# Altium PCB EXP-10-2.PcbDoc
Units mm, origin at the board's own origin, x right, y up, seen from the top; angles counter-clockwise.
Board outline 152.4 x 136.53 mm, 2 copper layers (Top Layer, Bottom Layer); 66 components, 92 nets, 204 pads, 26 vias.
Unrouted connection lines stored in the file: 16.
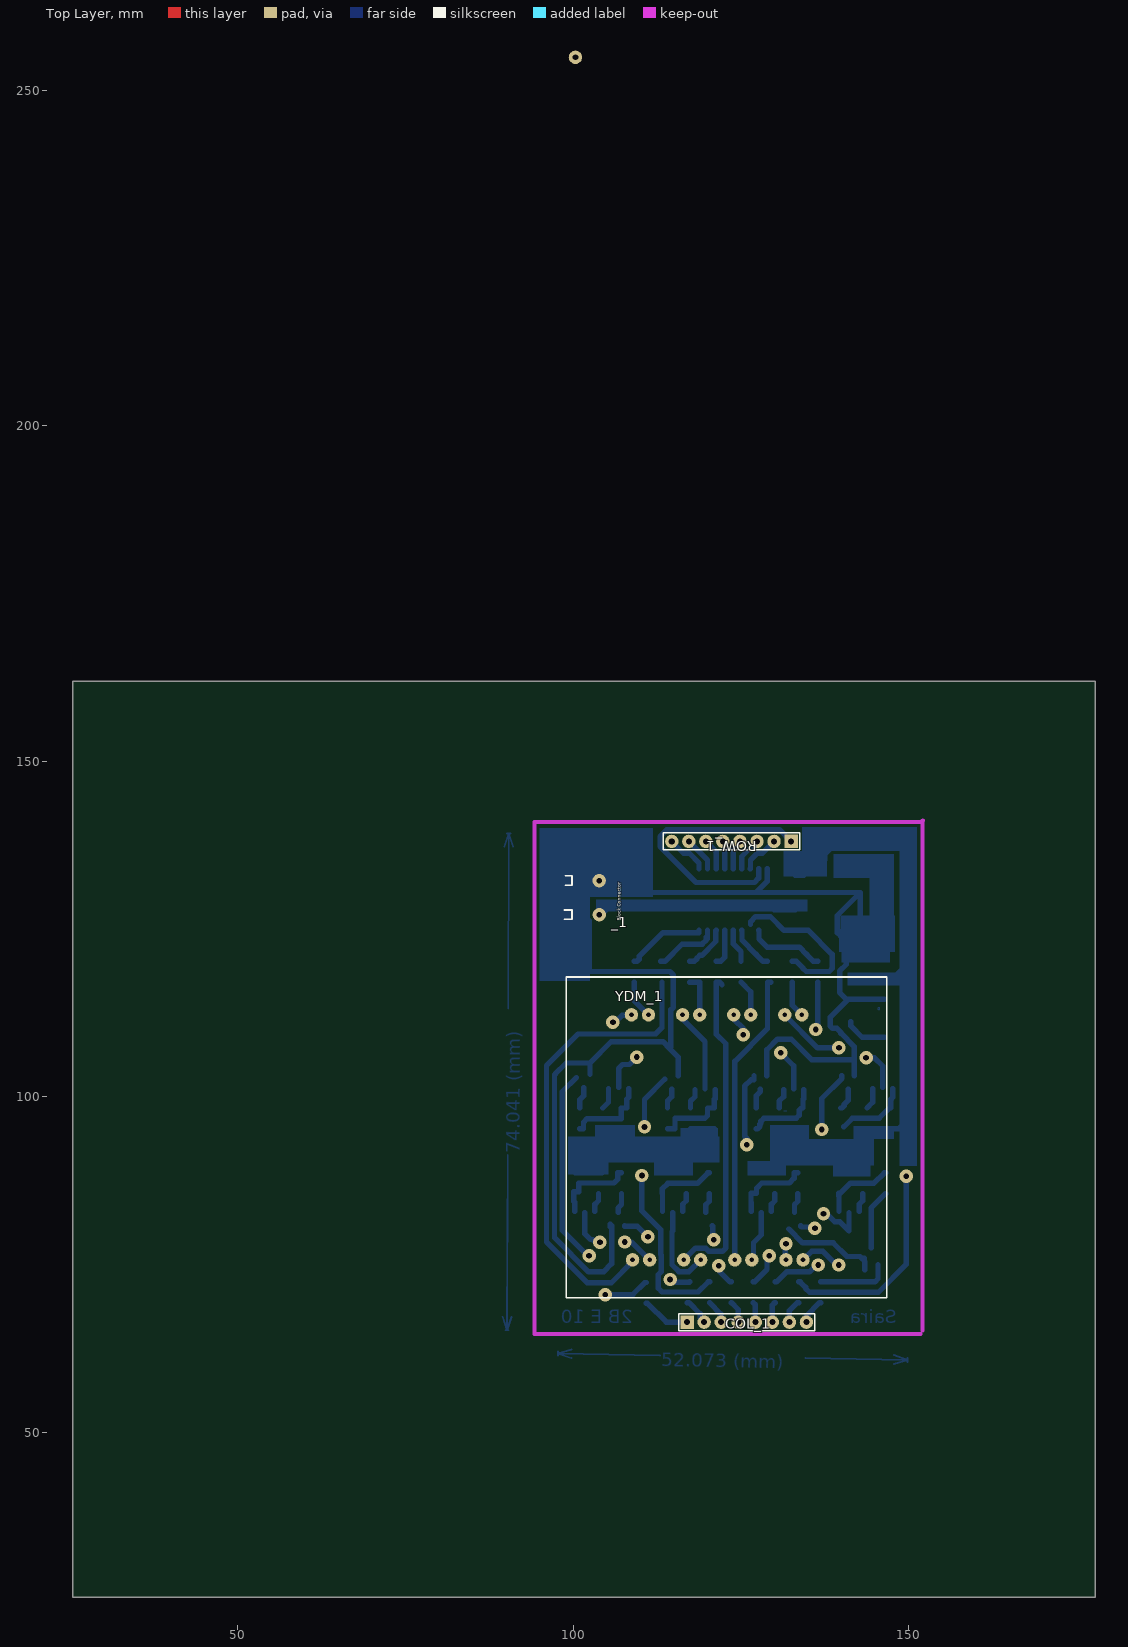
[diagram p0: Top Layer view]
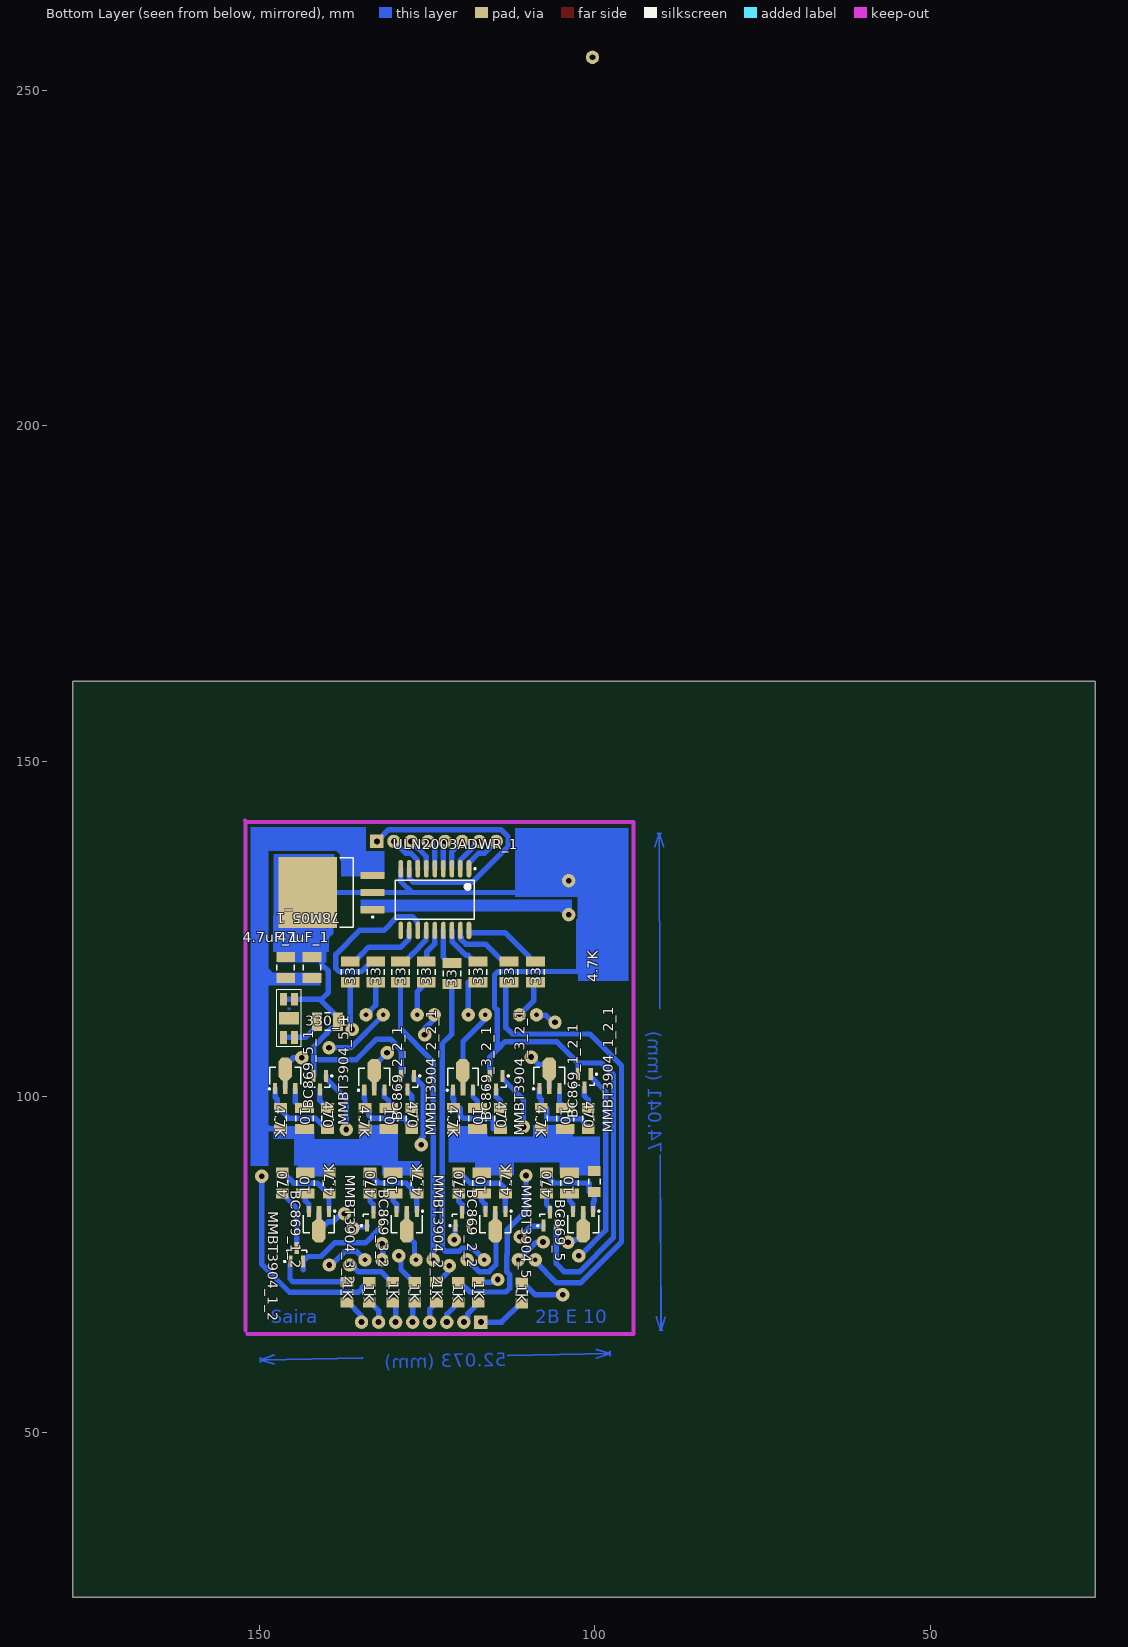
[diagram p1: Bottom Layer view, seen from below]

## Layer stack, top to bottom
Top Solder: solder mask 0.0102, Solder Resist, Dk 3.5
Top Layer: signal copper 0.0356
Dielectric 1: dielectric 0.32, FR-4, Dk 4.8
Bottom Layer: signal copper 0.0356
Bottom Solder: solder mask 0.0102, Solder Resist, Dk 3.5

## Board outline
25.4,25.4 177.8,25.4 177.8,161.925 25.4,161.925

## Design rules (kind name [scope] priority, off if disabled: settings)
Clearance [All] p1: gap=0.35 ignorepadtopadclearanceinfootprint=FALSE
ComponentClearance [All] p1 off: gap=0.254 collisioncheckmode=3 verticalgap=0.254 showdistances=FALSE
PlaneClearance [All] p1: clearance=0.85
PolygonConnect [All] p1: connectstyle=Direct reliefconductorwidth=0.254 reliefentries=4 polygonreliefangle="90 Angle" airgapwidth=0.254
RoutingVias [All] p1: holewidth=0.711 width=1.27 viastyle="Through Hole" minholewidth=0.711 minwidth=1.27 maxholewidth=0.711 maxwidth=1.27
SolderMaskExpansion [All] p1: expansion=0.102 istentingtop=FALSE
Width [All] p1: maxlimit=0.8 minlimit=0.8 preferedwidth=0.8
28 further rules are at their usual default settings.

## Components (designator, comment, footprint, x,y, rotation, side; value= is the part's Value field where it differs from the comment)
1K "Comment" RESC3216M 133.604,70.866 r270 bottom
1K "Comment" RESC3216M 110.871,70.765 r270 bottom
1K "Comment" RESC3216M 126.825,70.866 r270 bottom
1K "Comment" RESC3216M 120.317,70.866 r270 bottom
1K "Comment" RESC3216M 130.08,70.866 r270 bottom
1K "Comment" RESC3216M 123.571,70.866 r270 bottom
1K "Comment" RESC3216M 136.906,70.866 r270 bottom
1K "Comment" RESC3216M 117.348,70.866 r270 bottom
4.7K "Comment" RESC3216M 121.031,96.774 r270 bottom
4.7K "Comment" RESC3216M 134.239,96.774 r270 bottom
4.7K "Comment" RESC3216M 107.95,96.774 r270 bottom
4.7K "Comment" RESC3216M 146.812,96.774 r270 bottom
4.7K "Comment" RESC3216M 126.492,87.148 r90 bottom
4.7K "Comment" RESC3216M 113.284,87.148 r90 bottom
4.7K "Comment" RESC3216M 139.573,87.148 r90 bottom
4.7K "Comment" RESC3216M 100.055,87.376 r90 bottom
4.7uF_1 "Comment" CAPC3225M 146.05,119.253 r90 bottom
10 "Comment" RESC3225M 117.475,96.774 r270 bottom
10 "Comment" RESC3225M 130.683,96.774 r270 bottom
10 "Comment" RESC3225M 104.394,96.774 r270 bottom
10 "Comment" RESC3225M 143.256,96.774 r270 bottom
10 "Comment" RESC3225M 130.048,87.122 r90 bottom
10 "Comment" RESC3225M 116.84,87.122 r90 bottom
10 "Comment" RESC3225M 143.129,87.122 r90 bottom
10 "Comment" RESC3225M 103.759,87.122 r90 bottom
33 "Comment" RESC3225M 108.822,118.618 r90 bottom
33 "Comment" RESC3225M 112.776,118.618 r90 bottom
33 "Comment" RESC3225M 121.285,118.364 r90 bottom
33 "Comment" RESC3225M 117.385,118.618 r90 bottom
33 "Comment" RESC3225M 128.942,118.618 r90 bottom
33 "Comment" RESC3225M 125.095,118.618 r90 bottom
33 "Comment" RESC3225M 136.435,118.618 r90 bottom
33 "Comment" RESC3225M 132.625,118.618 r90 bottom
47uF_1 "Comment" CAPC3225M 142.113,119.253 r90 bottom
78M05_1 "Comment" TO254P1420-4M 139.198,130.429 r0 bottom
330_1 "Comment" RESC3225M 139.827,111.187 r180 bottom
470 "Comment" RESC3216M 114.046,96.774 r270 bottom
470 "Comment" RESC3216M 127.254,96.774 r270 bottom
470 "Comment" RESC3216M 100.965,96.774 r270 bottom
470 "Comment" RESC3216M 139.827,96.774 r270 bottom
470 "Comment" RESC3216M 133.477,87.122 r90 bottom
470 "Comment" RESC3216M 120.269,87.122 r90 bottom
470 "Comment" RESC3216M 146.558,87.122 r90 bottom
470 "Comment" RESC3216M 107.188,87.122 r90 bottom
_1 "Comment" "PCB Block Connector" 103.632,129.667 r90 top
BC869_1_2 "Comment" SOT89M 141.097,81.01 r270 bottom
BC869_1_2_1 "Comment" SOT89M 106.754,103.128 r90 bottom
BC869_2_2 "Comment" SOT89M 114.808,81.01 r270 bottom
BC869_2_2_1 "Comment" SOT89M 132.842,102.919 r90 bottom
BC869_3_2 "Comment" SOT89M 128.016,81.01 r270 bottom
BC869_3_2_1 "Comment" SOT89M 119.634,102.919 r90 bottom
BC869_5 "Comment" SOT89M 101.727,81.01 r270 bottom
BC869_5_1 "Comment" SOT89M 146.124,103.128 r90 bottom
COL_1 "Comment" HDR1X8 116.967,66.421 r0 top
MMBT3904_1_2 "Comment" SOT23-3M 144.399,76.454 r90 bottom
MMBT3904_1_2_1 "Comment" SOT23-3M 101.539,102.378 r270 bottom
MMBT3904_2_2 "Comment" SOT23-3M 119.761,81.788 r90 bottom
MMBT3904_2_2_1 "Comment" SOT23-3M 127.889,102.108 r270 bottom
MMBT3904_3_2 "Comment" SOT23-3M 132.969,81.788 r90 bottom
MMBT3904_3_2_1 "Comment" SOT23-3M 114.681,102.108 r270 bottom
MMBT3904_5 "Comment" SOT23-3M 106.68,81.788 r90 bottom
MMBT3904_5_1 "Comment" SOT23-3M 140.97,102.108 r270 bottom
ROW_1 "Comment" HDR1X8 132.461,138.049 r180 top
ULN2003ADWR_1 "Comment" SOIC127P1030-18M 123.825,129.385 r270 bottom
YDM_1 "Comment" "Yellow or Green Dot Matrix DIsplay" 122.725,93.954 r0 top net-tie
? "Comment" SMD-LED 145.542,111.695 r90 bottom

## Footprints (in the part's own frame and the unit in brackets; to place one, negate y for a bottom-side part, rotate by r counter-clockwise, add the part's x,y. Pads: shape width x height; smd on the part's side, far side on the other; paste and mask are expansions set on the pad)
CAPC3225M [mm] "Chip Capacitor, Body 3.2x2.5mm, IPC Low Density"
  rect 1.5x2.8 smd: 1(-1.55,0) 2(1.55,0)
  silkscreen extent -0.4,-1.3 0.4,1.3, body extent -1.7,-1.35 1.7,1.35, height 1.35
HDR1X8 [mm] "Connector; Header; 8 Position"
  rect 2x2 hole 0.9: 1(0,0)
  round 2 hole 0.9: 2(2.54,0) 3(5.08,0) 4(7.62,0) 5(10.16,0) 6(12.7,0) 7(15.24,0) 8(17.78,0)
  silkscreen extent -1.27,-1.27 19.05,1.27
"PCB Block Connector" [mm]
  round 2 hole 0.85: 1(-2.54,-0.254) 2(2.54,-0.24)
  silkscreen extent -3.22,3.82 3.26,4.96, body extent -5,-5.45 5.03,4.96, height 5.08
RESC3216M [mm] "Chip Resistor, Body 3.2x1.6mm, IPC Low Density"
  rect 1.5x1.9 smd: 1(-1.55,0) 2(1.55,0)
  silkscreen extent -0.4,-0.85 0.4,0.85, body extent -1.68,-0.87 1.68,0.87, height 0.71
RESC3225M [mm] "Chip Resistor, Body 3.2x2.5mm, IPC Low Density"
  rect 1.5x2.8 smd: 1(-1.55,0) 2(1.55,0)
  silkscreen extent -0.4,-1.3 0.4,1.3, body extent -1.68,-1.32 1.68,1.32, height 0.71
SMD-LED [mm] "SMD LED PCB"
  rect 1.9x1 smd: 1(-2.85,0.82) 2(-2.85,-0.82) 3(2.85,-0.82) 4(2.85,0.82)
  rect 1.8x3 smd: 5(0,0)
  Top Layer circle w0.154: c1.441,-0.01 r0.149
  silkscreen extent -4.25,-1.84 4.25,1.82
SOIC127P1030-18M [mm] "SOIC, 18-Leads, Body 11.6x7.5mm, Pitch 1.27mm, IPC Low Density"
  oval 2.6x0.7 smd: 1(-4.6,5.08) 2(-4.6,3.81) 3(-4.6,2.54) 4(-4.6,1.27) 5(-4.6,0) 6(-4.6,-1.27) 7(-4.6,-2.54) 8(-4.6,-3.81) 9(-4.6,-5.08) 10(4.6,-5.08) 11(4.6,-3.81) 12(4.6,-2.54) 13(4.6,-1.27) 14(4.6,0) 15(4.6,1.27) 16(4.6,2.54) 17(4.6,3.81) 18(4.6,5.08)
  silkscreen extent -4.72,-5.9 2.9,6.1, body extent -3.8,-5.95 3.8,5.95, height 2.65
SOT23-3M [mm] "SOT23, 3-Leads, Body 2.9x1.3mm, Pitch 0.95mm, Lead Span 2.5mm, IPC Low Density"
  rect 1.8x0.6 smd: b(-1,0.95) c(1,0) e(-1,-0.95)
  silkscreen extent -1.12,-1.5 0.7,1.93, body extent -0.7,-1.5 0.7,1.5, height 1.1
SOT89M [mm] "SOT89, 3-Leads, Body 4.5x2.4 mm, Pitch 1.5mm, Lead Span 4.1mm, IPC Low Density"
  rect 1.6x0.6 smd: b(-1.9,1.5) e(-1.9,-1.5)
  rect 2x0.7 smd: c(-1.7,0)
  oct 3.4x2 smd: c(1,0)
  silkscreen extent -2.07,-2.3 1.3,2.47, body extent -1.3,-2.3 1.3,2.3, height 1.6
TO254P1420-4M [mm] "D2-PAK, 4-Leads, Body 8.9x10.1mm, Pitch 2.54mm, Lead Span 14.2mm, IPC Low Density"
  rect 8.7x10.55 smd: C(3.55,0)
  rect 3.6x1.1 smd: GND(-6.1,0) input(-6.1,2.54) OUT(-6.1,-2.54)
  silkscreen extent -6.22,-5.2 -1.2,5.2, body extent -3.25,-5.2 6.15,5.2, height 4.65
"Yellow or Green Dot Matrix DIsplay" [mm] "Y or G Dot Matrix"
  round 2 hole 0.7: 3(-13.886,-18.262) 4(-11.346,-18.262) 6(-6.266,-18.262) 7(-3.726,-18.262) 9(1.354,-18.262) 10(3.894,-18.262) 12(8.974,-18.262) 13(11.514,-18.262) 20(11.346,18.262) 21(8.806,18.262) 23(3.726,18.262) 24(1.186,18.262) 26(-3.894,18.262) 27(-6.434,18.262) 29(-11.514,18.262) 30(-14.054,18.262)
  silkscreen extent -23.78,-23.9 23.99,23.89

## Free pads (board coordinates)
  round 2 hole 0.85: 2(100.33,254.889)

## Via types
v1: diameter 2, hole 0.85, Top Layer to Bottom Layer, 26 vias

## Nets (pads, with @x,y where several pads share a name; then routed paths per layer and width w, separated by ;. In a path a pad name is that pad's centre, name@x,y a point inside that pad or via, vN(x,y) a via of type N, cw(c..) or ccw(c..) an arc to the next point about the centre after c; other vN are vias at no path point)
1: 33.1@112.776,117.068 YDM_1.3 | length 69.5
  Bottom Layer w0.8: YDM_1.3 108.839,75.438 105.664,72.263 102.108,72.263 96.012,78.359 96.012,104.648 100.718,109.354 112.275,109.354 113.231,110.31 33.1@113.231,117.068
2: BC869_5.c YDM_1.4 | length 13.7
  Bottom Layer w0.8: BC869_5.c@101.727,82.71 101.727,79.576 102.57,78.733 102.911,78.733 103.105,78.539 103.75,78.539 v1(103.98,78.309) ; v1(107.696,78.359) 108.648,78.359 111.188,75.819 111.252,75.819 108.984,78.087
3: 33.1@121.285,116.814 YDM_1.6 | length 48.4
  Bottom Layer w0.8: YDM_1.6@116.561,75.794 118.209,77.442 119.724,77.442 120.204,76.962 122.213,76.962 122.731,77.48 122.731,107.901 121.322,109.31 121.322,117.068 121.812,117.068 33.1@122.162,116.718
4: BC869_2_2.c YDM_1.7 | length 13.2
  Bottom Layer w0.8: BC869_2_2.c@114.808,82.71 114.808,80.01 114.709,79.911 114.709,74.967 115.734,73.942 117.249,73.942 YDM_1.7
5: 33.1@128.942,117.068 YDM_1.9 | length 43.9
  Bottom Layer w0.8: YDM_1.9 124.079,105.283 128.942,110.146 128.942,117.068 33.1@129.413,117.068
6: BC869_3_2.c YDM_1.10 | length 6.8
  Bottom Layer w0.8: YDM_1.10@126.851,76.432 126.851,78.241 128.016,79.406 BC869_3_2.c@128.016,82.71
7: 33.1@136.435,117.068 YDM_1.12 | length 9.7
  Bottom Layer w0.8: YDM_1.12 131.572,75.819 131.572,77.978 v1(131.699,78.105) ; v1(136.132,110.019) 136.132,110.294 136.435,110.597 33.1@136.435,117.068
8: BC869_1_2.c YDM_1.13 | length 14.3
  Bottom Layer w0.8: YDM_1.13 135.509,76.962 137.222,76.962 139.254,74.93 v1(139.573,74.93) ; v1(137.287,82.55) 137.796,82.55 138.986,81.36 139.747,81.36 141.097,80.01 BC869_1_2.c@141.097,82.71
9: 33.1@132.625,117.068 YDM_1.20 | length 5.5
  Bottom Layer w0.8: 33.1@132.625,117.068 132.625,113.663 YDM_1.20
10: BC869_5_1.c YDM_1.21 | length 16.3
  Bottom Layer w0.8: YDM_1.21 131.532,112.143 136.388,107.287 v1(139.591,107.287) ; v1(143.637,105.791) 144.896,105.791 146.124,104.563 BC869_5_1.c@146.124,101.428
11: 33.1@125.095,117.068 YDM_1.23 | length 5.5
  Bottom Layer w0.8: 33.1@125.005,117.068 126.452,115.621 YDM_1.23
12: BC869_2_2_1.c YDM_1.24 | length 9.6
  Bottom Layer w0.8: YDM_1.24@124.039,111.454 125.349,110.144 v1(125.349,109.22) ; v1@130.937,106.807 130.654,106.807 132.842,104.619 132.842,103.919 BC869_2_2_1.c@132.842,101.219
  other v1: 130.937,106.553
13: 33.1@117.385,117.068 YDM_1.26 | length 6.3
  Bottom Layer w0.8: 33.1@117.385,117.068 118.832,117.068 YDM_1.26
14: BC869_3_2_1.c YDM_1.27 | length 11.6
  Bottom Layer w0.8: YDM_1.27@116.419,111.454 119.634,108.239 119.634,103.919 BC869_3_2_1.c@119.634,101.219
15: 33.1@108.822,117.068 YDM_1.29 | length 5.7
  Bottom Layer w0.8: 33.1@109.076,117.068 109.076,114.352 YDM_1.29
16: BC869_1_2_1.c YDM_1.30 | length 9.4
  Bottom Layer w0.8: v1(105.918,111.104) 106.243,111.104 107.258,112.119 108.144,112.119 YDM_1.30@108.547,112.522 ; BC869_1_2_1.c@106.754,101.428 106.754,104.212 107.354,104.812 108.368,104.812 v1(109.474,105.918)
_1: 33.2@112.776,120.168 ULN2003ADWR_1.17 | length 9.9
  Bottom Layer w0.8: 33.2@113.03,120.168 113.68,120.168 116.247,122.735 119.201,122.735 119.845,123.379 119.845,123.765 ULN2003ADWR_1.17@119.965,123.885 ; ULN2003ADWR_1.17@120.015,123.571 ULN2003ADWR_1.17
_3: 33.2@121.285,119.914 ULN2003ADWR_1.15 | length 5.5
  Bottom Layer w0.8: 33.2@121.322,120.168 121.972,120.168 122.555,120.751 ULN2003ADWR_1.15
_5: 33.2@128.942,120.168 ULN2003ADWR_1.13 | length 6.6
  Bottom Layer w0.8: ULN2003ADWR_1.13 125.145,124.735 125.145,123.329 127.245,121.229 127.245,121.215 128.292,120.168 33.2@128.942,120.168
_7: 33.2@136.435,120.168 ULN2003ADWR_1.11 | length 11.5
  Bottom Layer w0.8: ULN2003ADWR_1.11@127.685,124.835 ULN2003ADWR_1.11 127.685,124.735 127.685,123.499 128.88,122.304 133.699,122.304 134.775,121.229 134.775,121.178 135.785,120.168 33.2@136.435,120.168
_9: 33.2@132.625,120.168 ULN2003ADWR_1.12 | length 24.1
  Bottom Layer w0.8: ULN2003ADWR_1.12@126.415,125.685 126.415,126.071 127.179,126.835 129.361,126.835 131.411,124.785 135.028,124.785 138.585,121.229 138.585,119.107 138.145,118.668 134.724,118.668 134.19,119.202 134.19,119.252 133.275,120.168 33.2@132.625,120.168
_11: 33.2@125.095,120.168 ULN2003ADWR_1.14 | length 5.1
  Bottom Layer w0.8: ULN2003ADWR_1.14 123.825,122.812 125.005,121.632 33.2@125.005,120.168
_13: 33.2@117.385,120.168 ULN2003ADWR_1.16 | length 6.8
  Bottom Layer w0.8: 33.2@117.385,120.168 118.035,120.168 118.385,120.518 118.385,120.599 118.853,121.068 119.16,121.068 121.235,123.143 121.235,124.735 ULN2003ADWR_1.16
_15: 33.2@108.822,120.168 ULN2003ADWR_1.18 | length 12
  Bottom Layer w0.8: 33.2@109.076,120.168 109.472,120.168 109.822,120.518 109.822,120.914 113.368,124.46 118.695,124.46 118.745,124.51 ULN2003ADWR_1.18
D1: ROW_1.7 ULN2003ADWR_1.2 | length 5.2
  Bottom Layer w0.8: ROW_1.7 120.015,135.255 ULN2003ADWR_1.2
D2: 1K.2@117.348,69.316 COL_1.2 | length 4.1
  Bottom Layer w0.8: 1K.2@116.967,69.316 117.254,69.316 118.929,67.641 118.929,66.999 COL_1.2
D3: ROW_1.5 ULN2003ADWR_1.4 | length 4.2
  Bottom Layer w0.8: ROW_1.5 122.555,137.795 ULN2003ADWR_1.4
D4: 1K.2@123.571,69.316 COL_1.4 | length 3.3
  Bottom Layer w0.8: 1K.2@123.571,69.316 124.587,68.3 COL_1.4
D5: ROW_1.3 ULN2003ADWR_1.6 | length 5
  Bottom Layer w0.8: ULN2003ADWR_1.6 125.095,135.763 ROW_1.3
D6: 1K.2@130.079,69.316 COL_1.6 | length 3.1
  Bottom Layer w0.8: COL_1.6 129.667,68.966 130.017,69.316 1K.2@130.079,69.316
D7: ROW_1.1 ULN2003ADWR_1.8 | length 40.8
  Bottom Layer w0.8: ULN2003ADWR_1.8 127.635,132.57 127,131.935 118.289,131.935 112.931,137.293 112.931,138.774 113.956,139.799 130.711,139.799 ROW_1.1
D8: 1K.2@136.906,69.316 COL_1.8 | length 3.9
  Bottom Layer w0.8: COL_1.8 134.747,67.357 136.706,69.316 1K.2@136.906,69.316
D9: ROW_1.2 ULN2003ADWR_1.7 | length 6
  Bottom Layer w0.8: ULN2003ADWR_1.7 126.415,134.035 126.415,135.271 127.443,136.299 128.171,136.299 ROW_1.2
D10: 1K.2@133.604,69.316 COL_1.7 | length 3.6
  Bottom Layer w0.8: COL_1.7 132.207,68.119 133.404,69.316 1K.2@133.604,69.316
D11: ROW_1.4 ULN2003ADWR_1.5 | length 4.5
  Bottom Layer w0.8: ULN2003ADWR_1.5 123.825,137.033 ROW_1.4
D12: 1K.2@126.825,69.316 COL_1.5 | length 3
  Bottom Layer w0.8: 1K.2@126.825,69.316 127.127,69.014 COL_1.5
D13: ROW_1.6 ULN2003ADWR_1.3 | length 4.7
  Bottom Layer w0.8: ROW_1.6 121.285,136.525 ULN2003ADWR_1.3
D14: 1K.2@120.317,69.316 COL_1.3 | length 3.6
  Bottom Layer w0.8: 1K.2@120.317,69.316 122.047,67.586 COL_1.3
D15: ROW_1.8 ULN2003ADWR_1.1 | length 6.2
  Bottom Layer w0.8: ROW_1.8 116.443,136.287 117.293,136.287 118.745,134.835 ULN2003ADWR_1.1
D16: 1K.2@110.871,69.215 COL_1.1 | length 7.3
  Bottom Layer w0.8: 1K.2@110.871,69.215 111.071,69.215 113.865,66.421 COL_1.1
GND: 4.7uF_1.2 47uF_1.2 78M05_1.C 78M05_1.GND 330_1.2 ?.3 ?.4 _1.2 MMBT3904_1_2.e MMBT3904_1_2_1.e MMBT3904_2_2.e MMBT3904_2_2_1.e MMBT3904_3_2.e MMBT3904_3_2_1.e MMBT3904_5.e MMBT3904_5_1.e ULN2003ADWR_1.9 | length 241.5
  Bottom Layer w0.8: 97.205,103.275 97.205,79.009 102.3,73.914 104.521,73.914 105.73,75.123 MMBT3904_5.e ; 97.307,103.378 98.958,105.029 102.489,105.029 ; 101.727,118.745 101.804,118.668 102.362,118.668 ; MMBT3904_1_2_1.e 102.489,105.029 ; MMBT3904_5.e@105.53,80.645 MMBT3904_5.e@105.53,81.038 ; MMBT3904_3_2_1.e 115.631,105.918 114.331,107.219 ; MMBT3904_2_2_1.e 128.839,106.995 130.429,108.585 132.486,108.585 135.534,105.537 141.859,105.537 ; ULN2003ADWR_1.9 128.905,132.08 127.254,130.429 ; MMBT3904_3_2.e@132.119,80.288 134.175,78.232 138.746,78.232 140.778,76.2 142.703,76.2 142.949,75.954 143.349,75.954 143.349,75.554 MMBT3904_1_2.e ; 140.539,120.928 140.704,120.897 47uF_1.2@141.004,120.841 ; 140.683,120.831 140.683,119.703 139.7,118.72 139.7,115.531 140.677,114.554 140.994,114.554 ; 47uF_1.2@141.071,120.803 47uF_1.2@141.215,120.803 ; 47uF_1.2@141.071,121.195 142.558,122.682 ; 141.097,122.682 140.401,123.378 ; 47uF_1.2@141.351,120.785 4.7uF_1.2@144.665,120.785 ; 47uF_1.2@141.351,120.803 47uF_1.2@141.215,120.803 ; MMBT3904_5_1.e 141.859,103.169 141.859,105.537 ; 78M05_1.C@142.494,130.175 139.337,127.018 139.337,124.442 140.144,123.634 140.144,123.173 140.37,123.353 140.401,123.378 ; 143.449,74.184 MMBT3904_1_2.e@143.449,75.438 ; 4.7uF_1.2@144.665,120.803 4.7uF_1.2@145.288,120.803 ; ?.3@144.722,114.529 ?.4@146.362,114.529 ; ?.3@144.722,114.554 140.994,114.554 ; 102.362,118.668 114.387,118.668 114.926,118.129 114.926,113.325 114.542,112.941 114.542,107.43 114.331,107.219 ; 102.362,118.668 102.362,126.263 102.133,126.492 102.133,130.468 _1.2 105.65,130.429 127.254,130.429 ; 102.489,105.029 105.664,108.204 113.345,108.204 114.331,107.219 ; 127.254,130.429 78M05_1.GND 78M05_1.C 142.748,122.872 142.558,122.682 ; 140.401,123.378 141.211,124.028 142.558,122.682 ; 140.994,114.554 138.277,111.837 138.277,110.537 138.627,110.187 139.277,110.187 139.877,109.586 139.877,109.476 141.859,107.494 141.859,105.537 ; 47uF_1.2@141.215,120.803 141.827,121.221 142.27,121.523 143.129,122.111 142.558,122.682
Input: 78M05_1.input _1.1 | length 29.6
  Bottom Layer w0.8: _1.1 104.193,127.127 105.051,127.985 129.837,127.985 129.933,127.889 78M05_1.input
LED_R: 330_1.1 ?.1 ?.2 | length 6.3
  Bottom Layer w0.8: 330_1.1 141.377,110.537 143.069,108.844 ?.2 ?.1
N2b: 1K.1@117.348,72.416 MMBT3904_5.b | length 7.3
  Bottom Layer w0.8: MMBT3904_5.b 107.702,80.717 109.529,80.717 v1(111.125,79.121) ; v1(114.427,72.771) 114.939,72.771 115.189,72.521 115.329,72.381 117.313,72.381 1K.1@117.348,72.416
N2c: 470.1@107.188,85.572 MMBT3904_5.c | length 3
  Bottom Layer w0.8: MMBT3904_5.c 106.68,83.431 107.188,83.939 470.1@107.188,85.572
N2e: 
N4b: 1K.1@123.571,72.416 MMBT3904_2_2.b | length 5.6
  Bottom Layer w0.8: MMBT3904_2_2.b 120.811,80.688 120.811,78.833 v1(120.932,78.712) ; v1(121.666,74.831) 121.67,74.835 121.793,74.835 121.793,73.994 123.371,72.416 1K.1@123.571,72.416
N4c: 470.1@120.269,85.572 MMBT3904_2_2.c | length 3
  Bottom Layer w0.8: MMBT3904_2_2.c 119.761,83.922 120.269,84.43 470.1@120.269,85.572
N4e: 
N6b: 1K.1@130.079,72.416 MMBT3904_3_2.b | length 9.8
  Bottom Layer w0.8: 1K.1@130.079,72.416 130.279,72.416 131.779,73.916 135.186,73.916 136.2,74.93 v1(136.525,74.93) ; MMBT3904_3_2.b 133.919,80.69 134.019,80.59 135.818,80.59 v1(136.017,80.391)
N6c: 470.1@133.477,85.572 MMBT3904_3_2.c | length 3
  Bottom Layer w0.8: MMBT3904_3_2.c 132.969,83.922 133.477,84.43 470.1@133.477,85.572
N6e: 
N8b: 1K.1@136.906,72.416 MMBT3904_1_2.b | length 10.8
  Bottom Layer w0.8: 1K.1@136.906,72.416 144.946,72.416 145.415,72.885 MMBT3904_1_2.b@145.415,74.954
N8c: 470.1@146.558,85.572 MMBT3904_1_2.c | length 9
  Bottom Layer w0.8: MMBT3904_1_2.c 144.399,83.413 470.1@146.558,85.572
N8e: 
N10b: 1K.1@133.604,72.416 MMBT3904_5_1.b | length 40.2
  Bottom Layer w0.8: 1K.1@133.604,72.416 133.804,72.416 134.62,71.6 134.62,71.45 135.204,70.866 145.466,70.866 149.606,75.006 v1@149.606,87.565 ; v1(137.033,95.123) 137.033,99.731 140.02,102.718 MMBT3904_5_1.b
  other v1: 149.606,88.138
N10c: 470.1@139.827,98.324 MMBT3904_5_1.c | length 3.4
  Bottom Layer w0.8: 470.1@139.827,98.324 140.027,98.324 140.377,98.674 140.377,98.874 140.97,99.467 MMBT3904_5_1.c
N10e: 
N12b: 1K.1@126.825,72.416 MMBT3904_2_2_1.b | length 16.2
  Bottom Layer w0.8: v1(125.857,92.837) 125.857,93.802 125.552,94.107 125.552,101.575 126.492,102.514 126.939,102.514 MMBT3904_2_2_1.b ; 1K.1@126.825,72.416 127.025,72.416 128.863,74.254 128.863,75.969 v1(129.19,76.296)
N12c: 470.1@127.254,98.324 MMBT3904_2_2_1.c | length 3
  Bottom Layer w0.8: 470.1@127.254,98.324 127.254,100.139 127.889,100.774 MMBT3904_2_2_1.c
N12e: 
N14b: 1K.1@120.317,72.416 MMBT3904_3_2_1.b | length 35
  Bottom Layer w0.8: v1(110.236,88.265) 110.236,82.993 113.058,80.171 113.058,76.488 113.129,76.417 113.129,73.948 112.677,73.496 112.677,71.462 113.223,70.916 118.617,70.916 120.117,72.416 1K.1@120.317,72.416 ; v1(110.617,95.504) 110.617,99.594 MMBT3904_3_2_1.b@113.631,102.608
N14c: 470.1@114.046,98.324 MMBT3904_3_2_1.c | length 3
  Bottom Layer w0.8: 470.1@114.046,98.324 114.046,99.39 114.681,100.025 MMBT3904_3_2_1.c
N14e: 
N16b: 1K.1@110.871,72.315 MMBT3904_1_2_1.b | length 36.1
  Bottom Layer w0.8: MMBT3904_1_2_1.b@100.489,102.878 98.355,100.744 98.355,80.122 102.149,76.327 v1(102.362,76.327) ; v1(104.775,70.513) 108.869,70.513 110.671,72.315 1K.1@110.871,72.315
N16c: 470.1@100.965,98.324 MMBT3904_1_2_1.c | length 3.3
  Bottom Layer w0.8: 470.1@100.965,98.324 100.965,99.543 101.539,100.117 MMBT3904_1_2_1.c
N16e: 
P2b: 4.7K.1@100.055,85.826 470.2@107.188,88.672 BC869_5.b | length 12.6
  Bottom Layer w0.8: BC869_5.b 100.227,84.277 100.055,84.449 100.055,85.826 100.838,85.826 100.838,87.147 106.07,87.147 106.638,87.715 106.638,88.672 470.2@107.188,88.672
P2c: 
P2e: 10.1@103.759,85.572 BC869_5.e | length 2.9
  Bottom Layer w0.8: BC869_5.e 103.227,83.972 103.759,84.504 10.1@103.759,85.572
P4b: 4.7K.1@113.284,85.598 470.2@120.269,88.672 BC869_2_2.b | length 12.1
  Bottom Layer w0.8: 4.7K.1@113.284,85.598 113.284,86.284 4.7K.1@113.308,86.308 ; BC869_2_2.b 113.308,85.598 4.7K.1@113.308,86.308 ; 470.2@120.269,88.672 120.066,88.672 118.49,87.097 114.097,87.097 4.7K.1@113.308,86.308
P4c: 
P4e: 10.1@116.84,85.572 BC869_2_2.e | length 2.9
  Bottom Layer w0.8: BC869_2_2.e 116.308,83.972 116.84,84.504 10.1@116.84,85.572
P6b: 4.7K.1@126.492,85.598 470.2@133.477,88.672 BC869_3_2.b | length 11.9
  Bottom Layer w0.8: BC869_3_2.b 126.516,84.226 126.492,84.25 126.492,85.598 127.305,85.598 127.305,86.36 128.092,87.147 132.207,87.147 132.927,87.867 132.927,88.672 470.2@133.477,88.672
P6c: 
P6e: 10.1@130.048,85.572 BC869_3_2.e | length 2.9
  Bottom Layer w0.8: BC869_3_2.e 129.516,83.972 130.048,84.504 10.1@130.048,85.572
P8b: 4.7K.1@139.573,85.598 470.2@146.558,88.672 BC869_1_2.b | length 11
  Bottom Layer w0.8: BC869_1_2.b 139.597,85.248 139.573,85.272 139.573,85.598 139.773,85.598 141.31,87.135 144.821,87.135 146.358,88.672 470.2@146.558,88.672
P8c: 
P8e: 10.1@143.129,85.572 BC869_1_2.e | length 2.9
  Bottom Layer w0.8: BC869_1_2.e 142.597,83.972 143.129,84.504 10.1@143.129,85.572
P10b: 4.7K.1@146.812,98.324 470.2@139.827,95.224 BC869_5_1.b | length 11.2
  Bottom Layer w0.8: 470.2@140.335,95.532 141.602,96.799 145.592,96.799 147.117,98.324 147.32,98.324 147.32,99.619 147.624,99.923 BC869_5_1.b
P10c: 
P10e: 10.1@143.256,98.324 BC869_5_1.e | length 3.3
  Bottom Layer w0.8: 10.1@143.764,98.324 144.624,99.184 BC869_5_1.e
P12b: 4.7K.1@134.239,98.324 470.2@127.254,95.224 BC869_2_2_1.b | length 11.8
  Bottom Layer w0.8: 470.2@127.254,95.224 127.454,95.224 127.804,95.574 127.804,95.9 127.946,96.043 127.946,96.331 128.415,96.799 133.22,96.799 133.689,97.268 133.689,97.974 134.039,98.324 134.239,98.324 134.239,99.619 134.342,99.722 BC869_2_2_1.b
P12c: 
P12e: 10.1@130.683,98.324 BC869_2_2_1.e | length 3
  Bottom Layer w0.8: 10.1@130.683,98.324 130.683,99.339 131.342,99.998 BC869_2_2_1.e
P14b: 4.7K.1@121.031,98.324 470.2@114.046,95.224 BC869_3_2_1.b | length 12.6
  Bottom Layer w0.8: 470.2@114.046,95.224 115.164,95.224 115.164,96.799 119.634,96.799 120.015,97.18 120.015,98.324 121.031,98.324 121.031,99.619 121.134,99.722 BC869_3_2_1.b
P14c: 
P14e: 10.1@117.475,98.324 BC869_3_2_1.e | length 3
  Bottom Layer w0.8: 10.1@117.475,98.324 117.475,99.339 118.134,99.998 BC869_3_2_1.e
P16b: 4.7K.1@107.95,98.324 470.2@100.965,95.224 BC869_1_2_1.b | length 12.8
  Bottom Layer w0.8: 470.2@100.965,95.224 101.524,95.224 101.524,96.19 102.083,96.749 107.163,96.749 107.163,98.324 107.95,98.324 107.95,99.619 108.254,99.923 BC869_1_2_1.b
P16c: 
P16e: 10.1@104.394,98.324 BC869_1_2_1.e | length 3.3
  Bottom Layer w0.8: 10.1@104.394,98.324 105.254,99.184 BC869_1_2_1.e
VCC: 4.7K.2 4.7uF_1.1 10.2 47uF_1.1 78M05_1.OUT | length 152.5
  Bottom Layer w0.8: 4.7K.2@100.055,88.926 100.309,88.672 103.759,88.672 104.267,88.672 104.394,88.799 104.394,92.329 ; 4.7K.2@107.95,95.224 104.394,95.224 104.394,92.329 ; 113.284,89.535 113.284,88.698 113.31,88.672 116.84,88.672 117.125,88.672 117.475,89.022 117.475,92.123 ; 4.7K.2@121.031,95.224 117.475,95.224 117.475,92.123 ; 4.7K.2@126.492,88.698 128.245,88.698 128.271,88.672 130.048,88.672 130.333,88.672 130.683,89.022 130.683,92.123 ; 78M05_1.OUT 134.348,132.969 136.008,134.629 137.214,135.836 138.412,137.033 148.99,137.033 149.02,137.003 149.02,118.872 149.02,95.719 148.551,95.25 147.362,95.25 147.336,95.224 143.764,95.224 143.764,91.955 ; 4.7K.2@134.239,95.224 130.683,95.224 130.683,92.123 ; 4.7K.2@139.573,88.698 143.103,88.698 143.129,88.672 143.779,88.672 143.764,88.687 143.764,91.955 ; 47uF_1.1@141.885,117.703 47uF_1.1 145.262,117.703 145.288,117.729 147.75,117.729 148.893,118.872 ; 104.394,92.329 117.269,92.329 117.475,92.123 ; 130.683,92.123 143.596,92.123 143.764,91.955
pads on no net: ?.5 ULN2003ADWR_1.10
copper on no net: | length 101.7
  Bottom Layer w0.254: 89.474,67.201 90.133,65.198 ; 89.714,137.242 90.387,139.239 ; 89.879,65.199 90.387,65.198 ; 90.133,139.24 90.641,139.239 ; 90.223,91.335 90.133,65.198 ; 90.298,113.103 90.387,139.239 ; 90.807,67.196 90.133,65.198 ; 91.047,137.237 90.387,139.239
  Bottom Layer w0.3: 97.714,61.441 97.725,62.041 ; 99.707,61.038 97.72,61.741 ; 99.731,62.371 97.72,61.741 ; 112.903,61.468 97.72,61.741 ; 134.601,61.078 149.785,60.806 ; 147.773,60.175 149.785,60.806 ; 147.797,61.508 149.785,60.806 ; 149.779,60.506 149.79,61.106

## Keep-outs
Keep-Out Layer:
  lines w0.254: 152.019,65.151 152.146,65.024
  lines w0.6: 151.765,64.643 94.234,64.643 94.234,140.97 151.892,140.97 152.082,141.16 ; 152.019,65.151 152.019,140.97

## Other copper
Bottom Layer:
  rectangle net VCC: 99.187,88.392 105.283,94.107
  rectangle net VCC: 103.251,91.948 109.22,95.758
  rectangle net VCC: 112.014,88.265 117.856,90.932
  rectangle net VCC: 115.951,93.599 121.539,95.377
  rectangle net VCC: 129.286,93.218 135.128,95.758
  rectangle net VCC: 125.984,88.265 131.699,90.424
  rectangle net VCC: 138.684,88.138 144.272,90.297
  rectangle net VCC: 141.732,93.726 147.828,95.631
  rectangle net VCC: 129.286,89.789 144.78,93.726
  rectangle net VCC: 103.251,90.17 121.793,94.107
  rectangle net VCC: 134.112,135.128 137.922,138.557
  rectangle net VCC: 140.843,116.586 151.257,118.491
  rectangle net VCC: 148.59,89.662 151.257,140.208
  rectangle net VCC: 134.112,136.906 151.257,140.208
  rectangle net VCC: 131.318,132.842 137.795,136.652
  rectangle net Input: 103.378,127.635 134.874,129.413
  rectangle net P12e: 131.318,97.79 131.826,97.917
  rectangle net GND: 94.996,117.221 102.489,139.573
  rectangle net GND: 94.996,129.794 111.887,140.081
  rectangle net GND: 140.335,120.015 145.288,126.492
  rectangle net GND: 138.811,132.588 147.828,136.144
  rectangle net GND: 144.145,126.746 147.828,132.842
  rectangle net GND: 141.224,120.269 145.542,122.301
  rectangle net GND: 139.827,123.317 147.955,127
  rectangle net GND: 139.573,121.539 147.955,124.968
  rectangle net GND: 139.954,120.015 147.193,124.206
  text "74.041 (mm)" at 92.024,91.583 h2 r89.8
  text "2B E 10" at 108.874,66.259 h2
  text "Saira" at 148.244,66.259 h2
  text "52.073 (mm)" at 113.128,59.864 h2 r358.97

## Text inside footprints (layer, text, board x,y; h text height)
_1: Top Overlay "Block Connector" at 107.061,126.238 h0.51 r90